# EAGLE board datapath (EAGLE 9.6.2)
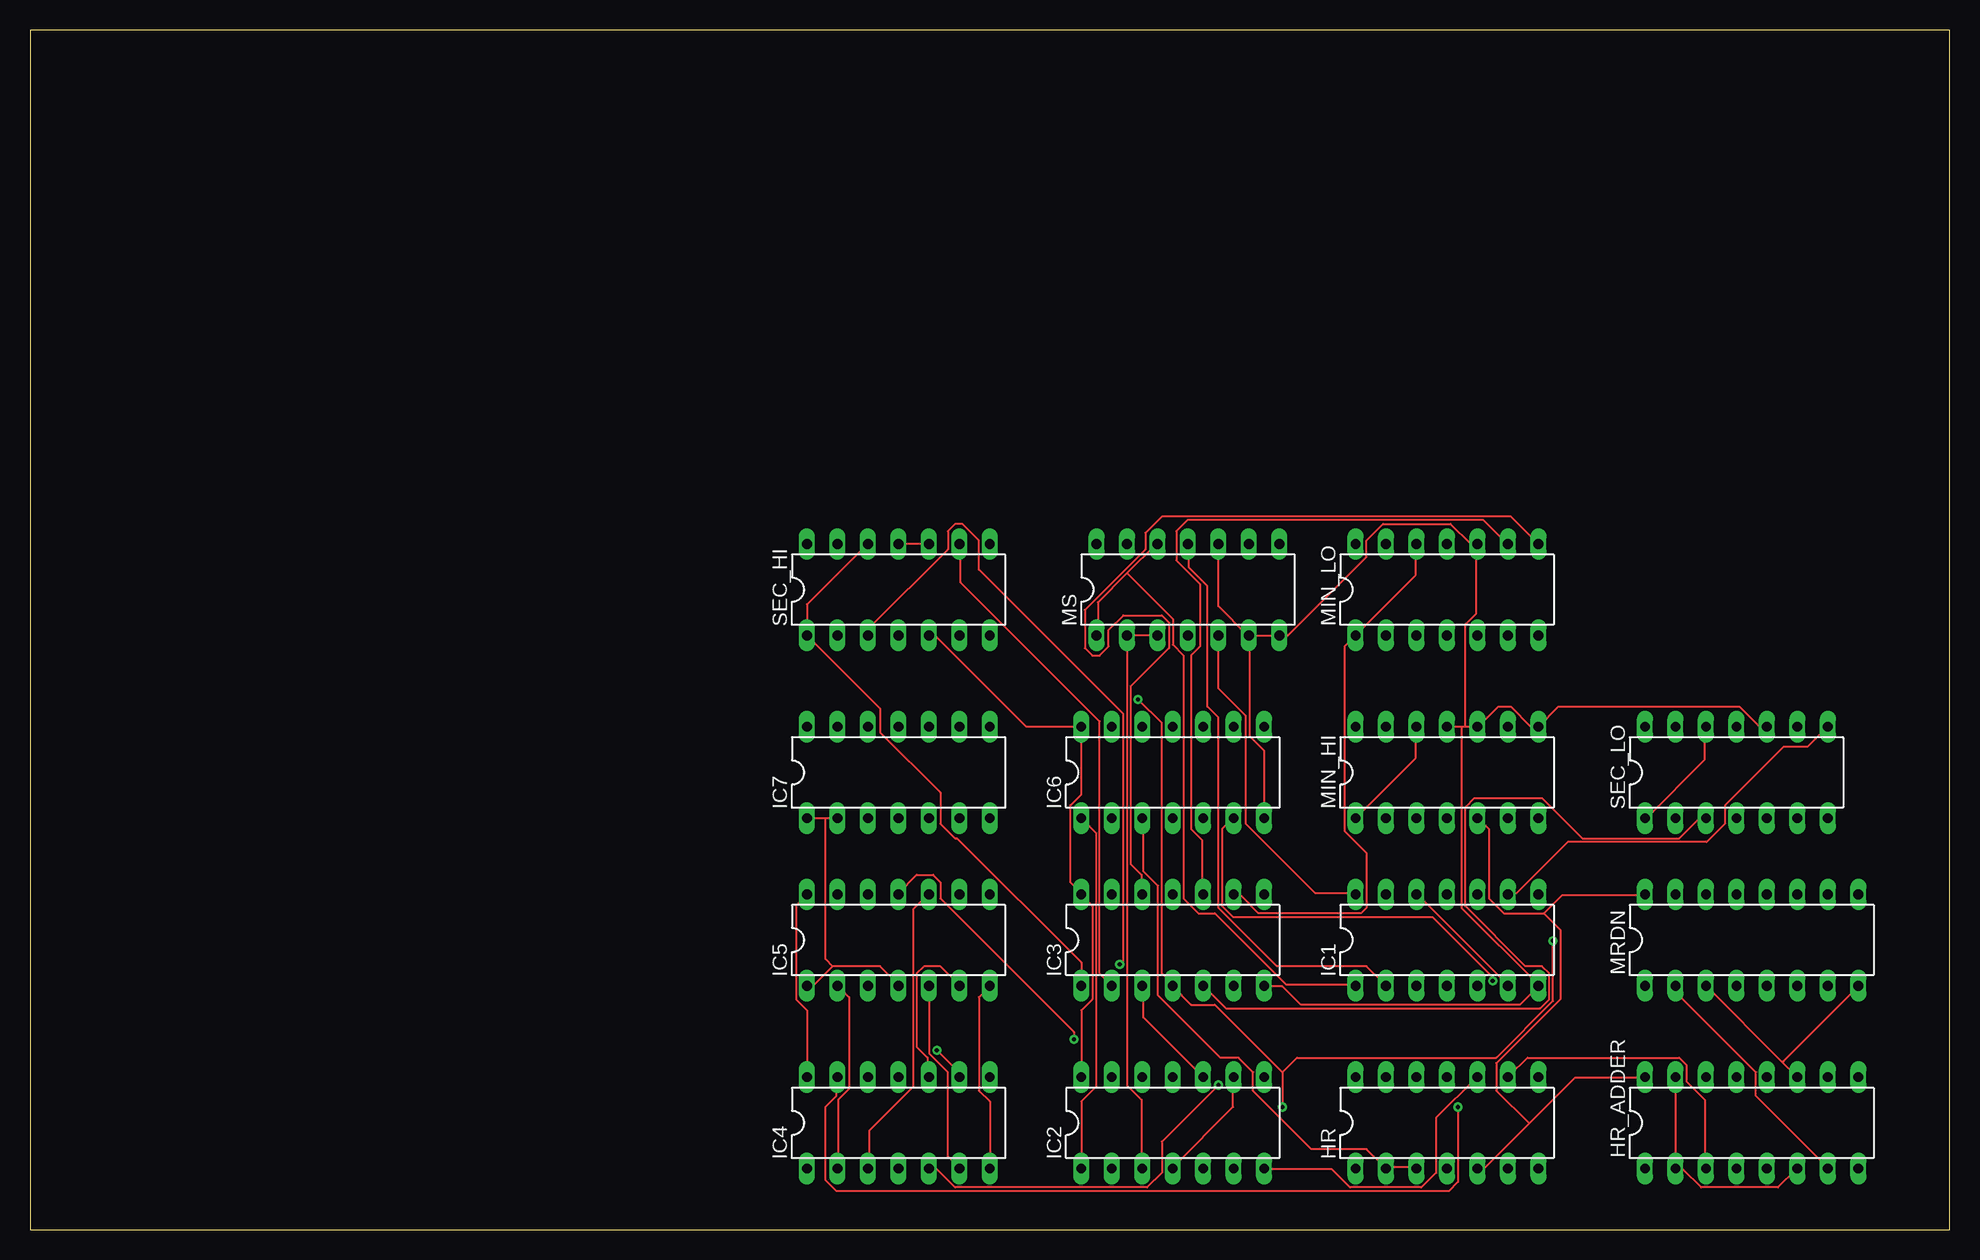
[diagram p0: board, top side]
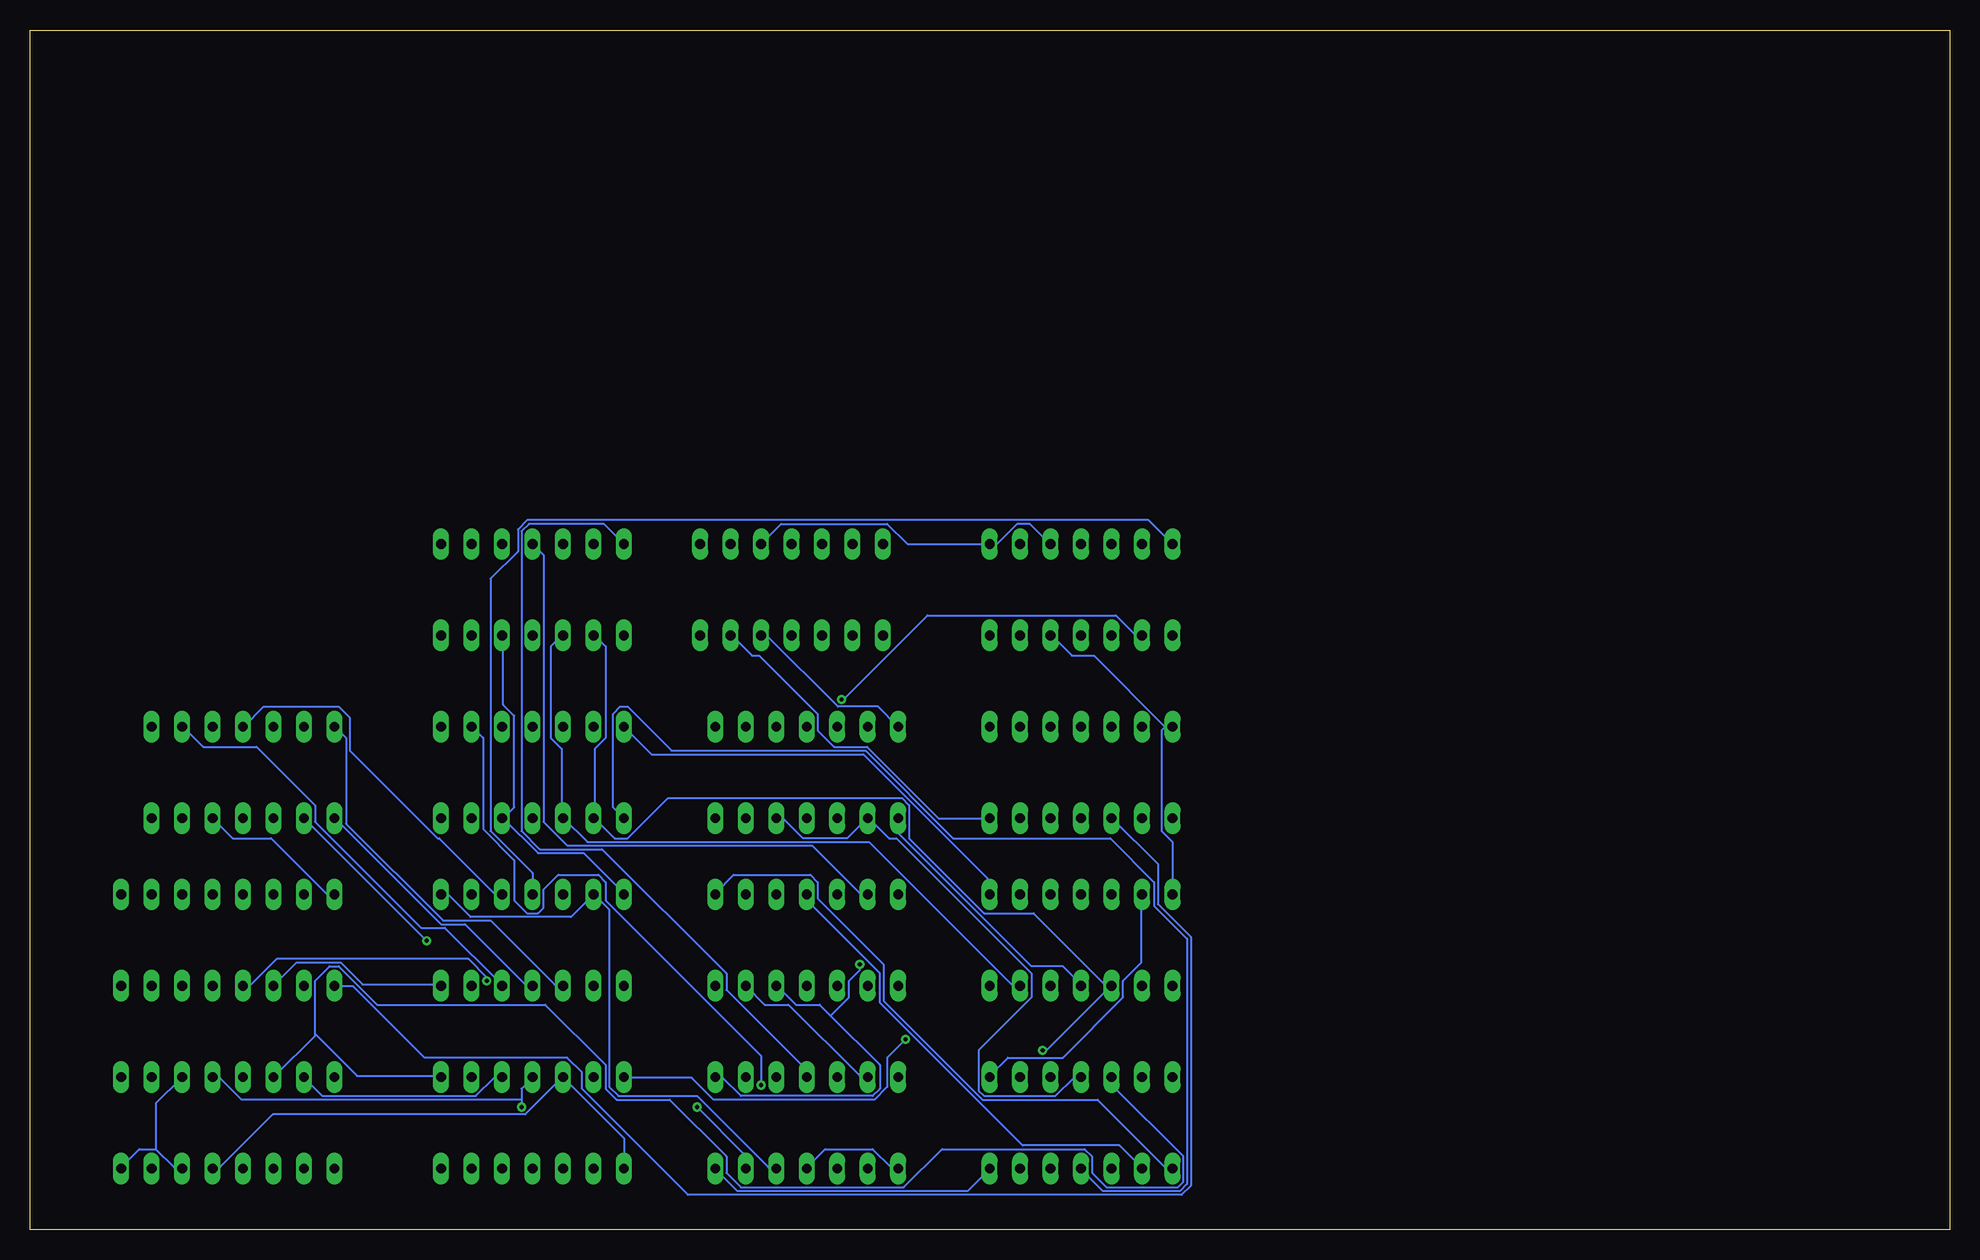
[diagram p1: board, bottom side, seen from below]

Size 160 x 100 mm. Coordinates in mm from the lower left corner, seen from the top.
Outline: 0,0 160,0 160,100 0,100 0,0
Copper layers (1*16): Top 0.035mm / dielectric 1.5mm / Bottom 0.035mm
Design rules "default": minimum track width 6mil, minimum drill 0.35mm, track to track 6mil, track to pad 6mil, pad to pad 6mil, via to via 6mil, smd to smd 6mil, copper to edge 40mil, drill to drill 6mil, minimum pad ring 10mil, minimum via ring 8mil, stop-mask expansion 4mil, vias tented up to drill 0mil, thermal gap 10mil

## Footprints (pad centres in the part's own frame; a part is rotated, then mirrored left to right if it is on the bottom)
DIL14 = drill 0.813 long: 1 -7.62,-3.81; 2 -5.08,-3.81; 3 -2.54,-3.81; 4 0,-3.81; 5 2.54,-3.81; 6 5.08,-3.81; 7 7.62,-3.81; 8 7.62,3.81; 9 5.08,3.81; 10 2.54,3.81; 11 0,3.81; 12 -2.54,3.81; 13 -5.08,3.81; 14 -7.62,3.81
DIL16 = drill 0.813 long: 1 -8.89,-3.81; 2 -6.35,-3.81; 3 -3.81,-3.81; 4 -1.27,-3.81; 5 1.27,-3.81; 6 3.81,-3.81; 7 6.35,-3.81; 8 8.89,-3.81; 9 8.89,3.81; 10 6.35,3.81; 11 3.81,3.81; 12 1.27,3.81; 13 -1.27,3.81; 14 -3.81,3.81; 15 -6.35,3.81; 16 -8.89,3.81

## Placement (x,y rotation side)
HR  74LS93N  [DIL14]  118.11,8.89 0 top
HR_ADDER  74LS283N  [DIL16]  143.51,8.89 0 top
IC1  74LS08N  [DIL14]  118.11,24.13 0 top
IC2  7432N  [DIL14]  95.25,8.89 0 top
IC3  74LS08N  [DIL14]  95.25,24.13 0 top
IC4  74LS08N  [DIL14]  72.39,8.89 0 top
IC5  7432N  [DIL14]  72.39,24.13 0 top
IC6  7432N  [DIL14]  95.25,38.1 0 top
IC7  7400N  [DIL14]  72.39,38.1 0 top
MIN_HI  74LS93N  [DIL14]  118.11,38.1 0 top
MIN_LO  74LS93N  [DIL14]  118.11,53.34 0 top
MRDN  74LS109N  [DIL16]  143.51,24.13 0 top
MS  74LS90N  [DIL14]  96.52,53.34 0 top
SEC_HI  74LS93N  [DIL14]  72.39,53.34 0 top
SEC_LO  74LS93N  [DIL14]  142.24,38.1 0 top

## Library data of the parts
HR HR_ADDER IC1-IC7 MIN_HI MIN_LO MRDN MS SEC_HI SEC_LO = 74xx-us

## Nets
0.0166_HZ: IC2.13 IC3.6
0.000277_HZ: IC4.8 IC5.13
1_HZ: IC1.3 SEC_LO.14
5V: HR_ADDER.7 MRDN.2
10_HZ: MS.14
ADD_HR: IC5.12
ADD_HR_LG: IC6.4
ADD_MIN: IC2.12
ADD_MIN_LG: IC5.9
AMPM: MRDN.6
CLR: IC7.3 MRDN.1
GND: HR.10 HR_ADDER.2 HR_ADDER.6 HR_ADDER.8 HR_ADDER.11 HR_ADDER.15 IC1.7 IC2.7 IC3.7 IC4.7 IC5.7 IC6.7 IC7.7 MIN_HI.8 MIN_HI.10 MIN_HI.11 MIN_LO.10 MRDN.3 MRDN.8 MS.6 MS.7 MS.10 SEC_HI.8 SEC_HI.10 SEC_HI.11 SEC_LO.10
HALT: IC2.2
HR0: HR_ADDER.4
HR1: HR_ADDER.1
HR2: HR_ADDER.13
HR3: HR_ADDER.10
HR_INC: HR.14 IC5.11
HR_INT_0: HR.1 HR.12 HR_ADDER.5
HR_INT_1: HR.9 HR_ADDER.3
HR_INT_2: HR.8 HR_ADDER.14 IC4.12
HR_INT_3: HR.11 HR_ADDER.12 IC4.13
HR_OVF: IC4.11 IC6.2 IC6.5
HR_RST: HR.2 HR.3 IC6.3
MIN0: IC3.9 MIN_LO.1 MIN_LO.12
MIN1: IC3.10 MIN_LO.9
MIN2: IC3.12 MIN_LO.8
MIN3: IC3.13 MIN_LO.11
MIN4: IC4.4 MIN_HI.1 MIN_HI.12
MIN5: IC4.5 MIN_HI.9
MIN_INC: IC2.11 MIN_LO.14
MIN_INC_LG: IC5.8 MIN_HI.14
MIN_LO_OVF: IC4.3 IC5.10
MIN_OVF_HI: IC4.6 IC5.5
MIN_OVF_LO: IC3.8 IC4.1
MIN_OVF_MID: IC3.11 IC4.2 IC5.2
MIN_R0: IC4.9 IC5.3 MIN_HI.2 MIN_LO.2
MIN_R1: IC4.10 IC5.6 MIN_HI.3 MIN_LO.3
MS0: IC1.1 MS.1 MS.12
MS1: MS.9
MS2: MS.8
MS3: IC1.2 MS.11
N$1: MRDN.5
RSHA_MS: IC2.3 MS.2 MS.3
RST: IC2.1 IC2.4 IC2.9 IC5.1 IC5.4 IC6.1 IC7.1 IC7.2
SEC0: IC1.4 SEC_LO.1 SEC_LO.12
SEC1: IC1.5 SEC_LO.9
SEC2: IC1.9 SEC_LO.8
SEC3: IC1.10 SEC_LO.11
SEC4: IC3.1 SEC_HI.1 SEC_HI.12
SEC5: IC3.2 SEC_HI.9
SEC_LO_OVF: IC1.11 SEC_HI.14
SEC_OVF_HI: IC2.10 IC3.3
SEC_OVF_LO: IC1.6 IC1.12
SEC_OVF_MID: IC1.8 IC1.13 IC2.5
SEC_R0: IC2.6 IC3.4 SEC_HI.2 SEC_LO.2
SEC_R1: IC2.8 IC3.5 SEC_HI.3 SEC_LO.3
T_MRDN: IC6.6 MRDN.4
VCC: HR.5 HR_ADDER.16 IC1.14 IC2.14 IC3.14 IC4.14 IC5.14 IC6.14 IC7.14 MIN_HI.5 MIN_LO.5 MRDN.16 MS.5 SEC_HI.5 SEC_LO.5

## Tracks (layer width: path | path; a pad name or v marks a point on that pad's centre or on a via)
0.0166_HZ
  Bottom 0.152: IC2.13 90.22,12.8 90.83,12.8 96.77,18.75 98.75,18.75 100.28,20.27 IC3.6
0.000277_HZ
  Bottom 0.152: IC5.13 67.36,27.89 67.36,22.25 68.89,20.73 68.89,19.36 73.91,14.33 78.49,14.33 80.01,12.8 IC4.8
1_HZ
  Bottom 0.152: IC1.3 115.67,20.42 116.28,20.42 121.61,25.76 125.58,25.76 133.66,33.83 133.66,41 134.57,41.91 SEC_LO.14
5V
  Top 0.152: MRDN.2 137.16,20.27 137.16,19.81 143.87,13.11 143.87,11.12 149.81,5.18 HR_ADDER.7
CLR
  Bottom 0.152: MRDN.1 134.57,20.27 133.04,20.27 127.1,14.33 115.21,14.33 114,13.11 114,11.73 105.16,2.9 64.01,2.9 63.25,3.66 63.25,24.38 65.99,27.13 65.99,30.48 69.8,34.29 IC7.3
GND
  Top 0.152: IC4.7 80.01,5.18 80.01,10.67 79.1,11.58 79.1,19.36 80.01,20.27 IC5.7 | HR_ADDER.15 137.16,12.65 137.16,5.18 HR_ADDER.2 137.16,5.03 137.77,5.03 139.29,3.5 145.69,3.5 147.22,5.03 HR_ADDER.6 | IC3.7 102.87,20.27 104.39,20.27 105.92,18.75 124.21,18.75 125.73,20.27 IC1.7 125.73,20.42 119.33,26.82 119.33,41.91 | 146,14.02 147.22,12.8 HR_ADDER.11 | 146,14.02 139.75,20.27 MRDN.3 | 146,14.02 146.15,14.02 152.4,20.27 MRDN.8 | IC2.7 102.87,5.03 108.51,5.03 110.03,3.5 115.98,3.5 117.2,4.72 117.2,9.3 120.55,12.65 HR.10 | 119.63,41.91 120.55,41.91 MIN_HI.10 120.7,41.91 122.38,43.59 123.44,43.59 125.12,41.91 MIN_HI.8 127.41,43.59 142.49,43.59 144.17,41.91 SEC_LO.10 | 119.63,41.91 119.33,41.91 | 119.33,41.91 MIN_HI.11 | 120.55,57.15 120.55,51.36 119.63,50.44 119.63,41.91 | 120.55,57.15 MIN_LO.10 120.55,57.15 | SEC_HI.11 74.83,57.15 SEC_HI.10 | IC6.7 102.87,39.93 101.65,41.15 101.65,49.53 | 101.65,49.53 MS.6 | 101.65,49.53 104.09,49.53 MS.7 104.24,49.53 104.85,49.53 111.4,56.08 111.4,57.45 112.78,58.83 118.42,58.83 120.09,57.15 120.55,57.15 | 101.65,49.53 MS.6 | MS.10 99.06,51.97 101.5,49.53 MS.6
  Bottom 0.152: IC2.7 102.87,5.03 101.04,3.2 81.84,3.2 80.01,5.03 IC4.7 | HR.10 120.7,12.65 121.31,12.65 122.83,11.12 135.64,11.12 137.16,12.65 HR_ADDER.15 | 149.5,6.71 147.98,5.18 147.37,5.18 HR_ADDER.6 | 149.5,6.71 150.88,6.71 152.4,5.18 HR_ADDER.8 | 149.5,6.71 149.5,10.52 147.37,12.65 HR_ADDER.11 | IC1.7 125.73,20.42 132.28,20.42 134.11,22.25 137.77,22.25 139.6,20.42 MRDN.3 | SEC_HI.10 74.98,57.15 76.66,58.83 77.72,58.83 79.4,57.15 SEC_HI.8 86.87,57.15 88.54,58.83 97.38,58.83 MS.10 | IC7.7 84.28,34.29 90.22,40.23 92.96,40.23 94.34,41.6 94.34,42.98 99.21,47.85 99.82,47.85 101.5,49.53 MS.6
HR_INC  (via drill 0.35)
  Top 0.152: v87.02,15.85 87.02,16.46 75.89,27.58 75.89,28.96 75.29,29.57 73.91,29.57 72.39,28.04 IC5.11
  Bottom 0.152: v87.02,15.85 88.54,14.33 88.54,11.89 89.61,10.82 103.02,10.82 104.85,12.65 110.49,12.65 HR.14
HR_INT_0
  Bottom 0.152: HR.1 110.49,5.18 110.49,7.62 115.52,12.65 HR.12 115.67,12.65 118.72,9.6 139.75,9.6 144.17,5.18 144.78,5.18 HR_ADDER.5
HR_INT_1
  Top 0.152: HR_ADDER.3 139.6,5.18 139.6,10.82 138.07,12.34 138.07,13.72 137.47,14.33 124.82,14.33 123.29,12.8 HR.9
HR_INT_2
  Bottom 0.152: 136.25,16.31 136.25,16.15 139.6,12.8 HR_ADDER.14 | 136.25,16.31 136.25,20.73 135.03,21.95 134.26,21.95 131.06,18.75 117.04,18.75 112.01,13.72 112.01,11.73 111.1,10.82 106.68,10.82 101.96,6.1 101.96,4.72 100.74,3.5 87.17,3.5 83.97,6.71 72.08,6.71 71.48,6.1 71.48,4.72 70.26,3.5 64.31,3.5 63.86,3.96 63.86,6.1 69.8,12.04 69.8,12.65 IC4.12 | 136.25,16.31 132.74,12.8 125.73,12.8 HR.8
HR_INT_3  (via drill 0.35)
  Top 0.152: v119.02,10.21 119.02,3.96 118.26,3.2 67.21,3.2 66.29,4.12 66.29,10.21 67.21,11.12 67.21,12.65 IC4.13
  Bottom 0.152: 119.02,10.82 119.02,11.73 118.11,12.65 HR.11 | 119.02,10.82 v119.02,10.21 | 119.02,10.82 142.34,10.82 144.17,12.65 144.78,12.65 HR_ADDER.12
HR_OVF
  Bottom 0.152: IC4.11 72.39,12.65 73,12.65 74.52,11.12 80.47,11.12 80.92,11.58 80.92,14.94 76.5,19.36 76.5,21.34 87.78,32.61 88.39,32.61 90.07,34.29 IC6.2 90.22,34.29 91.9,32.61 95.56,32.61 97.23,34.29 97.69,34.29 IC6.5
HR_RST
  Top 0.152: HR.3 115.52,5.18 113.08,5.18 HR.2 112.93,5.18 111.4,6.71 106.83,6.71 101.96,11.58 101.96,13.11 100.74,14.33 99.21,14.33 94.03,19.51 94.03,28.65 92.81,29.87 92.81,34.29 IC6.3
MIN0
  Top 0.152: IC3.9 100.43,27.89 100.89,27.89 102.41,26.36 110.95,26.36 111.4,26.82 111.4,31.39 109.58,33.22 109.58,48.62 MIN_LO.1 115.52,54.56 115.52,57.15 MIN_LO.12
MIN1
  Top 0.152: IC3.10 97.69,28.04 97.69,32.46 96.77,33.38 96.77,47.85 97.54,48.62 97.54,53.8 95.56,55.78 95.56,58.22 96.47,59.13 121.16,59.13 123.14,57.15 MIN_LO.9
MIN2
  Top 0.152: MIN_LO.8 123.44,59.44 94.34,59.44 92.96,58.06 92.96,56.69 87.94,51.66 87.94,48.46 88.54,47.85 89.15,47.85 89.92,48.62 89.92,49.99 91.14,51.21 94.34,51.21 94.94,50.6 94.94,48.46 91.75,45.26 91.75,30.48 92.66,29.57 92.66,28.04 IC3.12
MIN3
  Bottom 0.152: MIN_LO.11 117.2,56.24 117.2,33.98 115.21,32 94.79,32 90.83,28.04 90.22,28.04 IC3.13
MIN4
  Top 0.152: MIN_HI.1 115.52,39.32 115.52,41.91 MIN_HI.12
  Bottom 0.152: MIN_HI.1 111.4,35.2 111.4,42.98 110.8,43.59 110.19,43.59 106.53,39.93 90.37,39.93 83.06,32.61 69.95,32.61 66.29,28.96 66.29,26.98 63.55,24.23 63.55,3.81 64.16,3.2 70.56,3.2 72.39,5.03 IC4.4
MIN5  (via drill 0.35)
  Top 0.152: v99.06,12.04 94.34,7.32 94.34,4.72 93.12,3.5 77.11,3.5 75.59,5.03 74.98,5.03 IC4.5
  Bottom 0.152: v99.06,12.04 99.06,14.48 112.01,27.43 112.01,28.96 112.62,29.57 115.98,29.57 117.2,28.35 117.2,26.82 117.65,26.36 118.57,26.36 119.63,27.43 119.63,30.79 122.22,33.38 122.22,41 123.14,41.91 MIN_HI.9
MIN_INC
  Bottom 0.152: MIN_LO.14 112.17,58.83 118.42,58.83 119.02,58.22 119.02,33.22 117.5,31.7 112.32,31.7 101.96,21.34 101.96,19.96 95.25,13.26 95.25,12.8 IC2.11
MIN_INC_LG
  Bottom 0.152: MIN_HI.14 108.2,39.62 90.53,39.62 80.01,29.11 80.01,28.04 IC5.8
MIN_LO_OVF
  Top 0.152: IC4.3 69.95,5.18 69.95,8.23 73.61,11.89 73.61,26.67 74.83,27.89 IC5.10
MIN_OVF_HI
  Top 0.152: IC5.5 74.98,20.27 74.98,14.63 76.5,13.11 76.5,6.1 77.42,5.18 IC4.6
MIN_OVF_LO
  Bottom 0.152: IC4.1 64.77,5.18 65.38,5.18 71.02,10.82 80.62,10.82 88.85,19.05 88.85,22.1 94.34,27.58 94.34,28.96 94.94,29.57 101.35,29.57 102.87,28.04 IC3.8
MIN_OVF_MID
  Top 0.152: IC4.2 67.36,5.18 67.36,10.82 68.28,11.73 68.28,19.36 67.36,20.27 IC5.2
  Bottom 0.152: IC3.11 95.25,27.89 95.25,27.43 89.15,21.34 89.15,18.9 77.27,7.01 69.19,7.01 67.36,5.18 IC4.2
MIN_R0  (via drill 0.35)
  Top 0.152: v75.59,14.94 77.42,13.11 77.42,12.8 IC4.9
  Bottom 0.152: v75.59,14.94 75.29,14.94 70.1,20.12 | 70.1,20.12 69.95,20.27 IC5.3 70.1,20.12 | 112.93,34.29 112.93,40.08 112.01,41 112.01,48.62 112.93,49.53 MIN_LO.2 | 112.93,34.29 MIN_HI.2 112.93,34.29 | 70.1,20.12 76.35,26.36 80.47,26.36 86.72,32.61 86.72,35.36 87.33,35.97 106.83,35.97 110.19,32.61 111.25,32.61 112.93,34.29
MIN_R1
  Top 0.152: IC4.10 74.83,12.8 74.83,14.33 73.91,15.24 73.91,21.34 74.52,21.95 75.89,21.95 77.42,20.42 IC5.6
  Bottom 0.152: MIN_LO.3 115.67,49.53 116.59,48.62 116.59,41 115.67,40.08 115.67,34.29 MIN_HI.3 115.52,34.29 113.54,32.31 90.07,32.31 78.18,20.42 77.57,20.42 IC5.6
MS0
  Top 0.152: 91.44,54.71 93.88,57.15 MS.12 | 91.44,54.71 89,52.27 89,49.53 MS.1 | 91.44,54.71 95.25,50.9 95.25,48.77 96.16,47.85 96.16,27.58 97.38,26.36 98.75,26.36 104.7,20.42 110.49,20.42 IC1.1
MS3
  Top 0.152: MS.11 96.62,57.15 96.62,55.17 98.15,53.65 98.15,43.59 99.06,42.67 99.06,26.82 103.94,21.95 111.4,21.95 112.93,20.42 IC1.2
RSHA_MS
  Top 0.152: MS.3 93.88,49.53 MS.2 91.44,12.04 92.66,10.82 92.66,5.18 IC2.3
RST
  Top 0.152: IC2.9 100.28,12.65 100.28,10.21 95.25,5.18 IC2.4 | 66.29,34.29 67.21,34.29 IC7.2 | 66.29,34.29 IC7.1 | 66.9,21.95 65.38,20.42 64.77,20.42 IC5.1 | 66.9,21.95 70.87,21.95 72.39,20.42 IC5.4 | 66.29,34.29 66.29,22.55 66.9,21.95 | IC6.1 88.85,33.07 88.85,11.89 87.63,10.67 87.63,5.18 IC2.1
  Bottom 0.152: IC2.1 87.63,5.18 88.24,5.18 89.76,6.71 93.73,6.71 95.25,5.18 IC2.4 | IC6.1 87.63,33.07 76.5,21.95 73.91,21.95 72.39,20.42 IC5.4
SEC0
  Top 0.152: SEC_LO.12 139.6,41.91 139.6,39.17 134.72,34.29 SEC_LO.1
  Bottom 0.152: IC1.4 118.11,20.42 118.72,20.42 123.75,25.45 125.73,25.45 134.57,34.29 SEC_LO.1
SEC1
  Bottom 0.152: IC1.5 120.7,20.42 125.42,25.15 127.41,25.15 136.25,33.98 136.25,35.36 141.12,40.23 145.54,40.23 147.22,41.91 SEC_LO.9
SEC2
  Top 0.152: IC1.9 123.29,28.04 123.9,28.04 128.17,32.31 139.75,32.31 141.28,33.83 141.28,35.36 146.15,40.23 148.13,40.23 149.81,41.91 SEC_LO.8
SEC3
  Bottom 0.152: IC1.10 120.7,28.04 121.31,28.04 125.88,32.61 126.03,32.61 133.35,39.93 133.35,42.67 134.26,43.59 140.51,43.59 142.19,41.91 SEC_LO.11
SEC4
  Top 0.152: SEC_HI.12 69.8,57.15 64.77,52.12 SEC_HI.1 70.87,43.43 70.87,41.45 75.89,36.42 75.89,33.83 77.11,32.61 77.27,32.61 87.63,22.25 87.63,20.42 IC3.1
SEC5
  Top 0.152: SEC_HI.9 77.57,57.15 77.57,53.95 89.15,42.37 89.15,21.34 90.07,20.42 IC3.2
SEC_LO_OVF
  Bottom 0.152: SEC_HI.14 66.75,59.13 118.57,59.13 119.33,58.37 119.33,56.54 121.61,54.25 121.61,33.22 118.11,29.72 118.11,28.04 IC1.11
SEC_OVF_HI
  Top 0.152: IC3.3 92.81,20.27 92.81,17.68 97.69,12.8 IC2.10
SEC_OVF_LO
  Top 0.152: IC1.6 123.14,20.42 115.67,27.89 IC1.12
SEC_OVF_MID
  Bottom 0.152: IC2.5 97.84,5.18 98.45,5.18 104.39,11.12 110.95,11.12 111.71,11.89 111.71,26.67 112.93,27.89 IC1.13 113.08,27.89 114.91,26.06 123.29,26.06 125.12,27.89 125.73,27.89 IC1.8
SEC_R0  (via drill 0.35)
  Top 0.152: 104.39,13.11 v104.39,10.21 | 104.39,13.11 98.75,18.75 96.77,18.75 95.25,20.27 IC3.4 95.25,20.42 94.34,21.34 94.34,42.22 v92.35,44.2 | v126.95,24.08 126.95,19.05 122.22,14.33 105.61,14.33 104.39,13.11
  Bottom 0.152: v104.39,10.21 100.43,6.25 100.43,5.18 IC2.6 | v92.35,44.2 92.2,44.2 85.19,51.21 69.49,51.21 67.82,49.53 67.36,49.53 SEC_HI.2 | v126.95,24.08 SEC_LO.2
SEC_R1  (via drill 0.35)
  Top 0.152: v90.83,22.1 91.14,22.4 91.14,42.98 79.1,55.02 79.1,57.45 77.72,58.83 77.11,58.83 76.5,58.22 76.5,56.69 69.95,50.14 69.95,49.53 SEC_HI.3 | SEC_LO.3 139.6,34.29 139.14,34.29 137.47,32.61 129.39,32.61 126.03,35.97 120.4,35.97 119.63,35.2 119.63,26.98 124.66,21.95 126.03,21.95 126.64,21.34 126.64,19.2 125.88,18.44 99.67,18.44 97.84,20.27 IC3.5
  Bottom 0.152: 93.27,17.83 94.18,18.75 96.16,18.75 97.69,20.27 IC3.5 | 93.27,17.83 89.15,13.72 89.15,11.73 89.76,11.12 100.74,11.12 102.26,12.65 102.87,12.65 IC2.8 | v90.83,22.1 90.83,21.64 91.75,20.73 91.75,19.36 93.27,17.83
T_MRDN  (via drill 0.35)
  Top 0.152: v121.92,20.73 121.92,21.03 116.89,26.06 100.28,26.06 99.36,26.98 99.36,33.38 100.28,34.29 IC6.6
  Bottom 0.152: v121.92,20.73 121.92,21.03 123.44,22.55 139.45,22.55 141.58,20.42 142.19,20.42 MRDN.4
VCC
  Top 0.152: IC4.14 64.77,12.8 64.77,18.29 63.86,19.2 63.86,26.98 64.77,27.89 IC5.14 | IC2.14 87.63,12.8 87.63,18.29 88.54,19.2 88.54,26.98 87.63,27.89 IC3.14 87.63,28.04 86.72,28.96 86.72,35.36 87.63,36.27 IC6.14 83.06,41.91 75.44,49.53 74.98,49.53 SEC_HI.5 | 124.97,8.84 128.78,12.65 134.57,12.65 HR_ADDER.16 | 124.97,8.84 121.31,5.18 120.7,5.18 HR.5 | 126.19,26.36 127.71,27.89 134.57,27.89 MRDN.16 | 126.19,26.36 122.83,26.36 121.61,27.58 121.61,33.38 120.7,34.29 MIN_HI.5 | 124.97,8.84 122.22,11.58 122.22,13.87 127.56,19.2 127.56,24.99 126.19,26.36 | MS.5 99.06,45.11 101.35,42.82 101.35,33.83 107.14,28.04 110.49,28.04 IC1.14
  Bottom 0.152: 65.38,41.91 IC7.14 65.38,41.91 | 65.38,41.91 71.32,47.85 73.15,47.85 74.83,49.53 SEC_HI.5 | 65.38,41.91 65.68,41.6 65.68,33.22 64.77,32.31 64.77,28.04 IC5.14 | MS.5 98.6,49.53 92.66,43.59 89.31,43.59 IC6.14 | SEC_LO.5 143.1,32.61 139.9,32.61 135.33,28.04 134.72,28.04 MRDN.16 | 120.55,34.29 117.65,31.39 113.84,31.39 110.49,28.04 IC1.14 | 120.55,34.29 MIN_HI.5 120.55,34.29 | 120.55,34.29 119.63,35.2 119.63,42.82 120.55,43.74 120.55,49.53 MIN_LO.5